# Allegro board P1_GHERGHEL_EDUARD.brd
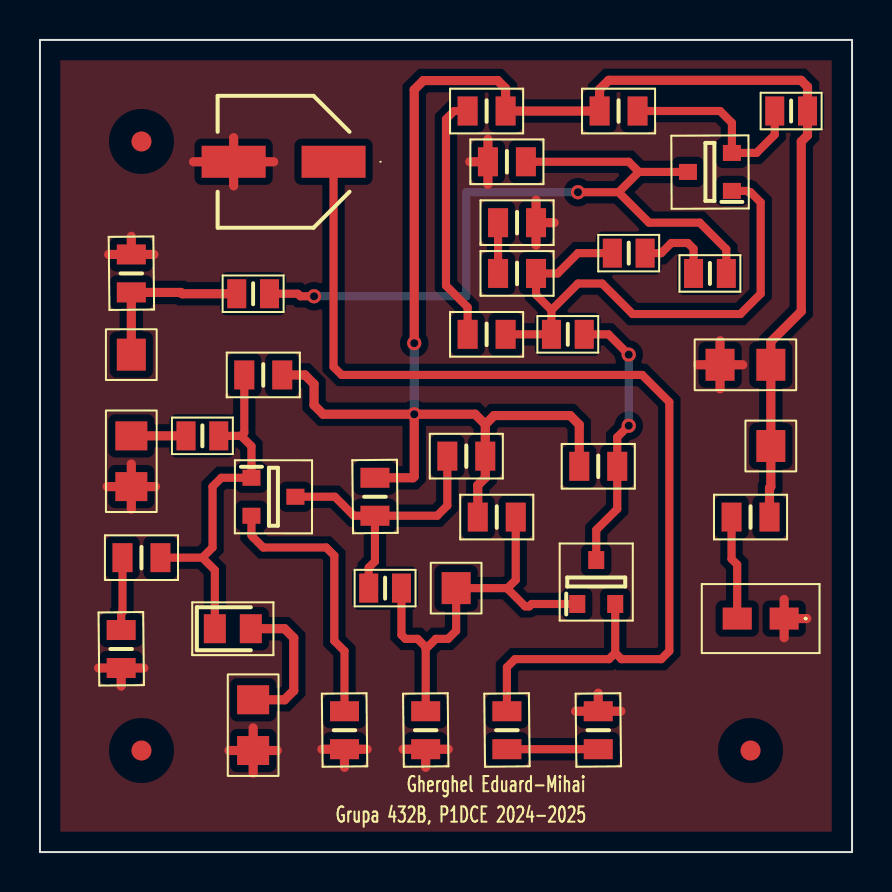
[diagram p0: board, top side]
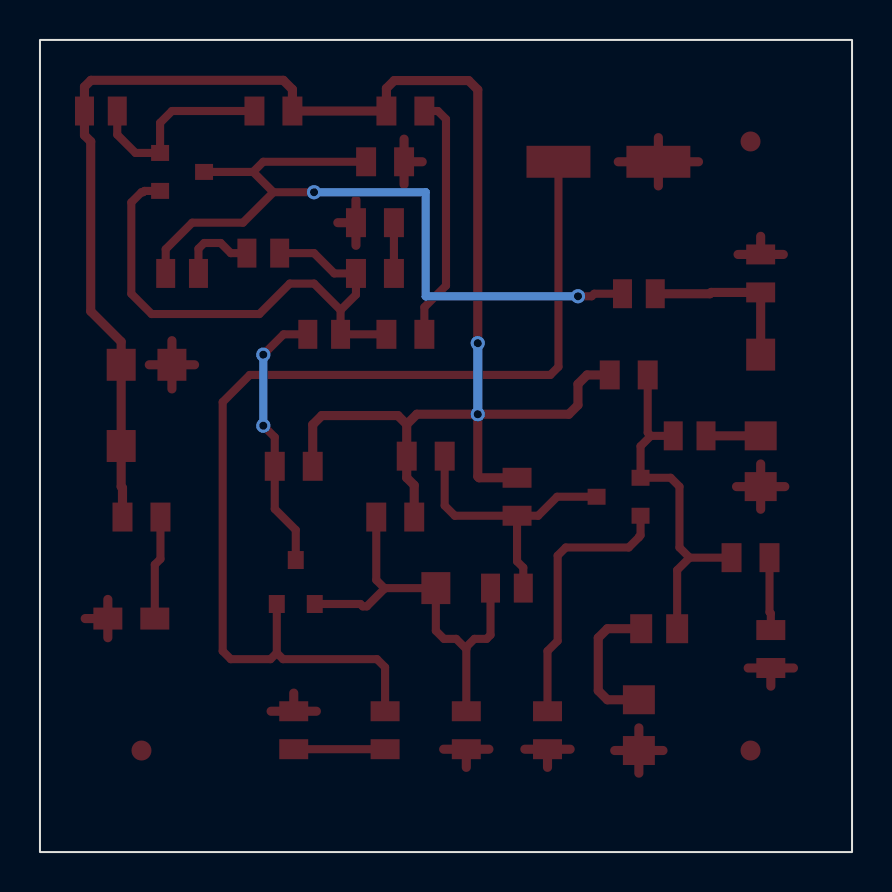
[diagram p1: board, bottom side, seen from below]

Outline 40.64 x 40.64 mm; copper layers: TOP, BOTTOM. Coordinates in mm from the lower left corner of the outline.
Outline path: rectangle 0,0 40.64,40.64

## Design rules (mm)
nets with their own width: min track width 0.406; nets N46861 N46865 N46897 N46923 N47041 N47107 N47129 N47195 N47341 N48046 N51606 N52312 N52470 N52652 N53834
nets with their own width: min track width 0.457; nets 0 0-5V 15V VIN VOUT

## Placement (name value [footprint] x y rotation side)
C4  1u  [CAPC2012X135N]  8.13 20.83 0 top
C6  1u  [CAPC2012X135N]  17.27 13.21 0 top
C7  1u  [CAPC2012X135N]  10.67 27.94 180 top
C11  1u  [CAPC2012X135N]  26.42 25.91 180 top
C13  22n  [CAPC2012X135N]  29.46 29.97 0 top
C14  4.7u  [CAPC2012X140N]  37.59 37.08 0 top
C15  22n  [CAPC2012X135N]  33.53 28.96 0 top
C17  10u  [EEE1AA101SP]  12.19 34.54 180 top
D1  SMLS14BET  [OFSMD2012B]  36.07 11.68 180 top
D2  D1N4148  [DIOC2012X95N]  9.65 11.18 0 top
J1  CON2  [JUMPER2]  36.58 24.38 180 top
J2  CON2  [JUMPER2]  10.67 5.08 90 top
J3  CON2  [JUMPER2]  4.57 18.29 90 top
J4  CON1  [JUMPER1]  36.58 20.32 0 top
J5  CON1  [JUMPER1]  4.57 24.89 0 top
J6  CON1  [JUMPER1]  20.83 13.21 0 top
NOREF  -  [unnamed]  5.08 35.56 0 top
NOREF#2  -  [#2]  41.66 0 90 top
NOREF#3  -  [#2]  0 42.16 0 top
NOREF#4  -  [unnamed]  35.56 5.08 0 top
NOREF#5  -  [unnamed]  5.08 5.08 0 top
Q1  BC817-25  [SOT95P230X110-3N]  11.68 17.78 0 top
Q2  BC817-25  [SOT95P230X110-3N]  27.84 13.51 90 top
Q4  BC807-25  [SOT95P230X110-3N]  33.53 34.04 180 top
R1  150  [RESC2013X65N]  15.24 6.1 90 top
R2  82  [RESC2013X65N]  16.76 17.78 90 top
R7  47k  [RESC2013X65N]  11.18 23.88 0 top
R8  1.8k  [RESC2013X65N]  5.08 14.73 0 top
R9  47k  [RESC2013X65N]  22.86 16.76 180 top
R10  6.8k  [RESC2013X65N]  19.3 6.1 90 top
R11  1k  [RESC2013X65N]  27.94 19.3 180 top
R13  82  [RESC2013X65N]  23.37 6.1 90 top
R16  1k  [RESC2013X65N]  4.57 28.96 270 top
R19  15k  [RESC2013X65N]  23.88 28.96 0 top
R20  2k  [RESC2013X65N]  23.37 34.54 0 top
R21  9.1k  [RESC2013X65N]  22.35 25.91 180 top
R22  510  [RESC2013X65N]  28.96 37.08 180 top
R24  15k  [RESC2013X65N]  35.56 16.76 0 top
R25  10  [RESC2013X65N]  4.06 10.16 90 top
R26  82  [RESC2013X65N]  21.34 19.81 0 top
R27  4.7  [RESC2013X65N]  27.94 6.1 270 top
R28  47k  [RESC2013X65N]  23.88 31.5 180 top
R29  9.1k  [RESC2013X65N]  22.35 37.08 0 top

## Library data of the parts
C4 C6 C7 C11 C13-C15 = C
C17 = CAP POL
D1 = SMLS14BET
D2 = 1N4148
J1-J3 = CON2: User Part Number: ***
J4-J6 = CON1: User Part Number: ***
Q1 Q2 = BC817-25
Q4 = BC807-25
R1 R2 R7-R11 R13 R16 R19-R22 R24-R29 = R

## Footprints (pads in the part's own frame, mm; a bottom-side part is the same pattern mirrored in y, then rotated)
CAPC2012X135N
  rect 0.95x1.45 smd: 1(-0.82,0) 2(0.82,0)
CAPC2012X140N
  rect 0.95x1.45 smd: 1(-0.82,0) 2(0.82,0)
DIOC2012X95N
  rect 1.1x1.45 smd: 1(-0.9,0) 2(0.9,0)
EEE1AA101SP
  rect 3.2x1.6 smd: 1(-2.5,0) 2(2.5,0)
JUMPER1
  rect 1.45x1.6 smd: 1(0,0)
JUMPER2
  rect 1.45x1.6 smd: 1(0,0) 2(2.54,0)
OFSMD2012B
  rect 1.45x1.1 smd: 1(-1.175,0) 2(1.175,0)
RESC2013X65N
  rect 1x1.45 smd: 1(-0.95,0) 2(0.95,0)
SOT95P230X110-3N
  rect 0.9x0.8 smd: 1(-1.1,0.95) 2(-1.1,-0.95) 3(1.1,0)
unnamed
  round 1 smd: (0,0)

## Nets
15V: C14.2 J1.1 J4.1 R2.2 R7.2 R9.2 R11.2 R22.2 R24.2 R26.2 R29.2
VIN: C4.1 J3.2
0: C17.2 D1.1(C) J1.2 J2.1 J3.1 R1.1 R10.1 R16.1 R20.1 R25.1 R27.1 R28.1
0-5V: D2.2 J2.2
VOUT: C7.2 J5.1 R16.2
N46861: C14.1 Q4.2(E) R22.1
N46865: C6.2 J6.1 Q2.1 R9.1 R10.2
N46897: C11.2 C13.1 Q4.1 R19.2 R21.1
N46923: C11.1 Q2.3 R11.1
N47041: C4.2 D2.1 Q1.1 R7.1 R8.2
N47107: C7.1 C15.2 Q4.3 R20.2
N47129: C6.1 Q1.3 R2.1 R26.1
N47195: C17.1 Q2.2(E) R13.2
N47341: Q1.2(E) R1.2
N48046: D1.2 R24.1
N51606: R8.1 R25.2
N52312: R13.1 R27.2
N52470: R19.1 R28.2
N52652: R21.2 R29.1
N53834: C13.2 C15.1

## Via types
v1: diameter 0.711, hole 0.406, TOP to BOTTOM, 6 vias

## Routing (per net, layer and track width the routed paths; a pad name or vN(x,y) marks a point on that pad's centre or on a via; arc(x,y) is an arc through that point)
15V: length 90
  TOP w0.457: R9.2 21.91,18.36 22.29,18.73 R26.2 22.29,21.4 ; R2.2 18.66,18.73 18.73,18.8 v1(18.73,21.91) ; 22.29,21.4 22.73,21.84 26.53,21.84 26.99,21.39 R11.2 ; 22.29,21.4 21.78,21.91 v1(18.73,21.91) ; v1(18.73,21.91) 14.17,21.91 13.72,22.37 13.72,23.42 13.26,23.88 R7.2 ; R24.2 36.51,18.22 36.58,18.29 J4.1 J1.1 36.58,25.54 38.1,27.06 38.1,35.56 38.41,35.87 C14.2 38.41,38.3 38.09,38.62 28.46,38.62 28.01,38.17 R22.2 R29.2 23.3,38.22 22.91,38.61 19.19,38.61 18.73,38.15 v1(18.73,25.47)
  BOTTOM w0.457: v1(18.73,25.47) v1(18.73,21.91)
VIN: length 2.7
  TOP w0.457: C4.1 J3.2
0: length 45.7
  TOP w0.457: 9.46,5.08 J2.1 ; J2.1 10.67,3.95 ; J2.1 10.67,6.21 ; J2.1 11.88,5.08 ; R16.1 4.57,30.81 ; R16.1 3.44,29.91 ; R16.1 5.7,29.91 ; R28.1 24.83,32.63 ; R28.1 24.83,30.36 ; R28.1 25.73,31.5 ; J3.1 4.57,19.42 ; J3.1 4.57,17.16 ; J3.1 3.36,18.29 ; J3.1 5.78,18.29 ; 34.04,23.18 J1.2 ; J1.2 35.17,24.38 ; J1.2 32.9,24.38 ; J1.2 34.04,25.59 ; 15.24,4.24 R1.1 ; R1.1 16.37,5.15 ; R1.1 14.11,5.15 ; R27.1 27.94,7.95 ; R27.1 26.81,7.05 ; R27.1 29.07,7.05 ; 7.69,34.54 C17.2 ; C17.2 9.69,35.75 ; C17.2 9.69,33.34 ; C17.2 11.7,34.54 ; D1.1 38.38,11.68 ; D1.1 37.24,12.64 ; D1.1 37.24,10.73 ; 2.93,9.21 R25.1 ; R25.1 4.06,8.3 ; R25.1 5.2,9.21 ; 19.3,4.24 R10.1 ; R10.1 20.44,5.15 ; R10.1 18.17,5.15 ; 21.51,34.54 R20.1 ; R20.1 22.42,33.41 ; R20.1 22.42,35.68
0-5V: length 7.2
  TOP w0.457: J2.2 12.24,7.62 12.7,8.08 12.7,10.72 12.24,11.18 D2.2
VOUT: length 8.4
  TOP w0.457: C7.2 7.11,27.94 7.05,28.01 R16.2 J5.1
N46861: length 10.2
  TOP w0.406: C14.1 36.77,35.9 35.86,34.99 Q4.2 34.63,36.49 34.04,37.08 R22.1
N46865: length 21.3
  TOP w0.406: 19.3,10.16 19.81,10.67 20.42,10.67 20.83,11.07 J6.1 23.4,13.21 ; 19.3,10.16 R10.2 ; 19.3,10.16 19.3,10.26 18.9,10.67 18.29,10.67 18.09,10.86 C6.2 ; Q2.1 24.6,12.41 24.49,12.29 24.28,12.29 23.4,13.17 23.4,13.21 ; 23.4,13.21 23.81,13.61 R9.1
N46897: length 28.2
  TOP w0.406: 25.6,27.12 C11.2 R21.1 ; 25.6,27.12 24.83,27.89 R19.2 25.91,28.96 26.92,29.97 C13.1 ; 25.6,27.12 26.92,28.45 28.14,28.45 29.66,26.92 35.05,26.92 36.07,27.94 36.07,32.51 35.56,33.02 35.47,33.02 35.41,33.09 Q4.1
N46923: length 13.6
  TOP w0.406: Q2.3 27.84,16.12 28.89,17.17 R11.1 28.89,20.76 v1(29.46,21.34) ; v1(29.46,24.89) 28.45,25.91 C11.1
  BOTTOM w0.406: v1(29.46,24.89) v1(29.46,21.34)
N47041: length 18.4
  TOP w0.406: D2.1 8.75,14.11 8.13,14.73 ; 8.13,14.73 8.64,15.24 8.64,18.29 9.08,18.73 Q1.1 10.58,20.31 10.07,20.83 ; 8.13,14.73 R8.2 ; 10.07,20.83 C4.2 ; 10.07,20.83 10.23,20.99 R7.1
N47107: length 40.3
  TOP w0.406: Q4.3 29.97,34.04 ; 29.97,34.04 28.96,33.02 ; 29.97,34.04 29.46,34.54 R20.2 ; 28.96,33.02 30.48,31.5 33.02,31.5 34.35,30.17 C15.2 ; 28.96,33.02 v1(26.92,33.02) ; C7.1 12.9,27.94 13.03,27.81 v1(13.72,27.81)
  BOTTOM w0.406: v1(26.92,33.02) 21.34,33.02 21.34,27.81 v1(13.72,27.81)
N47129: length 14.4
  TOP w0.406: R2.1 16.76,14.55 16.45,14.23 C6.1 ; R2.1 19.88,16.83 20.39,17.34 R26.1 ; R2.1 15.71,16.83 14.76,17.78 Q1.3
N47195: length 53.6
  TOP w0.406: C17.1 14.69,24.28 15.1,23.88 30.14,23.88 31.5,22.52 31.5,10.06 31.09,9.65 29.1,9.65 28.79,9.97 ; 28.79,9.97 28.47,9.65 23.77,9.65 23.37,9.25 R13.2 ; 28.79,9.97 Q2.2
N47341: length 13.6
  TOP w0.406: Q1.2 10.58,15.85 10.67,15.77 10.67,15.75 11.18,15.24 14.33,15.24 14.73,14.83 14.73,10.57 15.24,10.06 R1.2
N48046: length 5.2
  TOP w0.406: R24.1 34.61,14.67 34.89,14.38 D1.2
N51606: length 3.6
  TOP w0.406: R25.2 4.06,11.94 4.13,12.01 R8.1
N52312: length 4.6
  TOP w0.406: R13.1 R27.2
N52470: length 2.5
  TOP w0.406: R19.1 R28.2
N52652: length 12.7
  TOP w0.406: 21.4,36.86 R29.1 20.73,37.08 20.32,36.68 20.32,28.35 21.4,27.26 R21.2
N53834: length 4
  TOP w0.406: C15.1 32.71,30.19 32.42,30.48 31.6,30.48 31.09,29.97 C13.2

## Copper pours and planes (outline as drawn; the poured copper is in the pictures)
0 on TOP: 1.02,1.02 1.02,39.62 39.62,39.62 39.62,1.02 ; 1 cut-out

## Text on the board
Ref Des/Silkscreen Top: Grupa 432B, P1DCE 2024-2025 | Gherghel Eduard-Mihai
XSECTION_CHART: *  SURFACE - AIR 0 MIL | L1 TOP CONDUCTOR - COPPER 0.72 MIL | *  DIELECTRIC - FR-4 62.56 MIL | L2 BOTTOM CONDUCTOR - COPPER 0.72 MIL | DESIGN CROSS SECTION CHART | ___________________________ | TOTAL THICKNESS 64 MIL | 1-2
DIMENSION: FIGURE | FINISHED_SIZE | 16.0 | DRILL CHART: TOP to BOTTOM | ALL UNITS ARE IN MILS | PLATED | QTY | 6
